# EAGLE board source_eagle (EAGLE 9.6.2)
REV: A
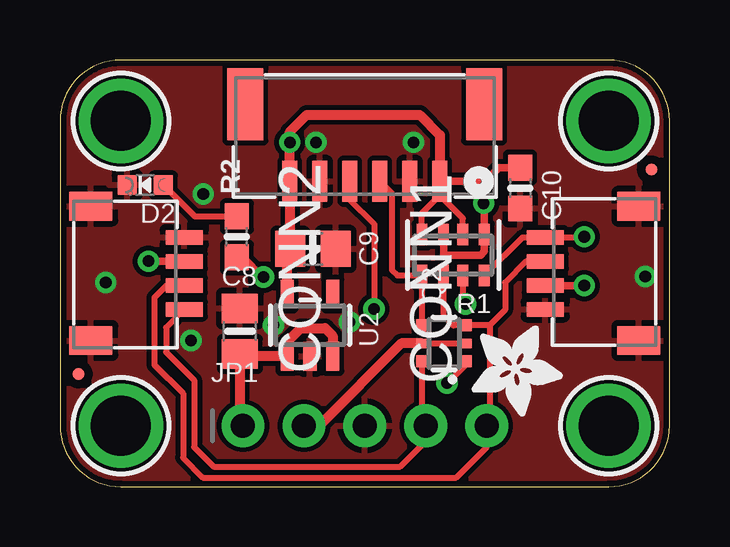
[diagram p0: board, top side]
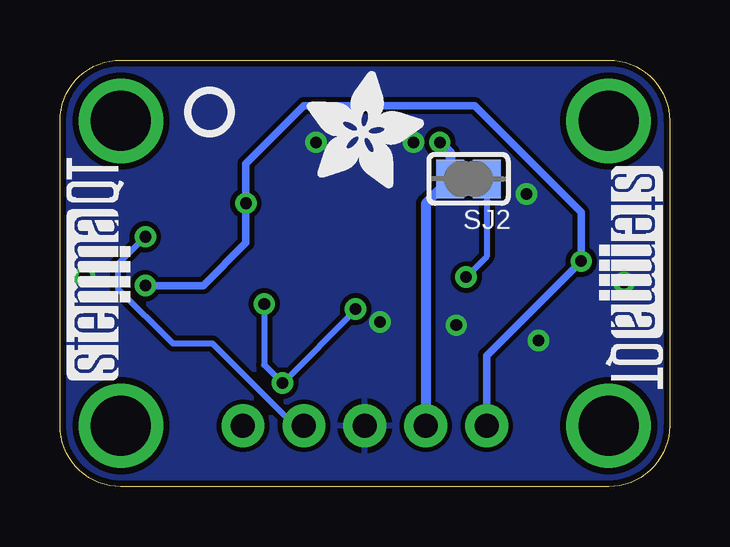
[diagram p1: board, bottom side, seen from below]

Size 25.4 x 17.78 mm. Coordinates in mm from the lower left corner, seen from the top.
Outline: 0,15.24 0,2.54 arc90 2.54,0 22.86,0 arc90 25.4,2.54 25.4,15.24 arc90 22.86,17.78 2.54,17.78 arc90 0,15.24
Copper layers (1*16): Top 0.035mm / dielectric 1.5mm / Bottom 0.035mm
Design rules "adafruit *": minimum track width 8mil, minimum drill 15.5mil, track to track 8mil, track to pad 8mil, pad to pad 8mil, via to via 8mil, smd to smd 8mil, copper to edge 10mil, drill to drill 8mil, minimum pad ring 10mil, minimum via ring 8mil, stop-mask expansion 2mil, vias tented up to drill 20mil, thermal gap 10mil
Net classes: 1 highpower: width 0.305 mm, drill 0.483 mm; 2 lowpower: width 0.254 mm, drill 0.483 mm

## Footprints (pad centres in the part's own frame; a part is rotated, then mirrored left to right if it is on the bottom)
0805-NO = smd 1.24 x 1.5: 1 -0.95,0; 2 0.95,0
0603-NO = smd 1.075 x 1: 1 -0.85,0; 2 0.85,0
JST_SH4 = smd 0.6 x 1.55: 1 -1.5,2.006; 2 -0.5,2.006; 3 0.5,2.006; 4 1.5,2.006 | smd 1.2 x 1.8: MT1 -2.8,-1.894; MT2 2.8,-1.894
CHIPLED_0603_NOOUTLINE = smd 0.8 x 0.8: A 0,-0.75; C 0,0.75
FIDUCIAL_0.5MM = smd 0.5 x 0.5: 1 0,0
1X05_ROUND_70 = drill 1 pad 1.778: 1 -5.08,0; 2 -2.54,0; 3 0,0; 4 2.54,0; 5 5.08,0
SOT363 = smd 0.5 x 0.5: 1 -0.75,-0.9; 3 0.75,-0.9; 4 0.75,0.9; 6 -0.75,0.9 | smd 0.4 x 0.5: 2 0,-0.9; 5 0,0.9
RESPACK_4X0603 = smd 0.45 x 0.9: 1 -1.3,-0.85; 2 -0.4,-0.85; 3 0.4,-0.85; 4 1.3,-0.85; 5 1.3,0.85; 6 0.4,0.85; 7 -0.4,0.85; 8 -1.3,0.85
SOLDERJUMPER_CLOSEDWIRE = smd 1.168 x 1.6: 1 -0.762,0; 2 0.762,0 | smd 0.635 x 0.203: WIRE 0,0
SOT23-5 = smd 0.55 x 1.2: 1 -0.95,-1.3; 2 0,-1.3; 3 0.95,-1.3; 4 0.95,1.3; 5 -0.95,1.3
MOUNTINGHOLE_2.5_PLATED = drill 2.5 pad 3.2: P$1 0,0
CONN_SM06B-GHS-TB_JST = smd 0.61 x 1.702: 1 -3.125,1.876; 2 -1.875,1.876; 3 -0.625,1.876; 4 0.625,1.876; 5 1.875,1.876; 6 3.125,1.876 | smd 1.5 x 3: 7 -4.975,-1.324; 8 4.975,-1.324

## Placement (x,y rotation side)
C8  10uF  [0805-NO]  7.49,6.48 90 top
C9  10uF  [0805-NO]  10.54,9.91 0 top
C10  0.1uF  [0603-NO]  19.18,12.45 270 top
CONN1  STEMMA_I2C_QT  [JST_SH4]  22.23,8.89 90 top
CONN2  STEMMA_I2C_QT  [JST_SH4]  3.17,8.89 270 top
D2  GREEN  [CHIPLED_0603_NOOUTLINE]  3.56,12.57 90 top
FID1  FIDUCIAL_0.5MM  [FIDUCIAL_0.5MM]  0.76,4.7 0 top
FID2  FIDUCIAL_0.5MM  [FIDUCIAL_0.5MM]  24.64,13.21 0 top
JP1  [1X05_ROUND_70]  12.7,2.54 0 top
PLABEL14  [PLABEL14]  6.48,13.34 90 top
PLABEL15  [PLABEL15]  20.32,14.35 90 top
PLABEL16  [PLABEL16]  7.62,0.89 0 top
PLABEL17  [PLABEL17]  10.03,4.19 0 top
PLABEL18  [PLABEL18]  12.83,0.89 0 top
PLABEL19  [PLABEL19]  15.24,4.19 0 top
PLABEL20  [PLABEL20]  18.03,0.89 0 top
PLABEL21  [PLABEL21]  0.38,12.45 0 top
PLABEL22  [PLABEL22]  12.7,0.89 0 bottom
PLABEL23  [PLABEL23]  8.26,14.61 0 bottom
PLABEL24  [PLABEL24]  12.7,7.62 0 bottom
Q2  BSS138  [SOT363]  16,5.97 90 top
R1  10K Pack  [RESPACK_4X0603]  16.38,9.65 180 top
R2  10K  [0603-NO]  7.37,10.41 90 top
SJ2  [SOLDERJUMPER_CLOSEDWIRE]  8.38,12.83 180 bottom
U2  AP2127K-3.3  [SOT23-5]  10.41,6.73 0 top
U$2  [ADAFRUIT_5MM]  15.11,12.45 0 bottom
U$35  MOUNTINGHOLE2.5  [MOUNTINGHOLE_2.5_PLATED]  2.54,15.24 0 top
U$36  MOUNTINGHOLE2.5  [MOUNTINGHOLE_2.5_PLATED]  22.86,15.24 0 top
U$38  MOUNTINGHOLE2.5  [MOUNTINGHOLE_2.5_PLATED]  2.54,2.54 0 top
U$39  MOUNTINGHOLE2.5  [MOUNTINGHOLE_2.5_PLATED]  22.86,2.54 0 top
U$41  [ADAFRUIT_3.5MM]  17.14,6.73 270 top
U$42  [PCBFEAT-REV-040]  19.18,15.62 0 bottom
U$43  [STEMMAQT]  22.48,4.45 90 bottom
U$44  [STEMMAQT]  2.92,13.34 270 bottom
X1  SM06B-GHS-TB  [CONN_SM06B-GHS-TB_JST]  12.7,14.61 180 top

## Library data of the parts
C8-C10 FID1 FID2 JP1 R1 R2 SJ2 U$2 U$41 U$42 = microbuilder
CONN1 CONN2 = adafruit_electromech; LCSC: C2845363
D2 Q2 = microbuilder; JLC_ROTATION: 270
PLABEL14-PLABEL24 = pinguin
U2 = adafruit_power; JLC_ROTATION: 270
U$35 U$36 U$38 U$39 = adafruit_electromech; BOM: EXCLUDE
U$43 U$44 = silks
X1 = adafruit_electromech

## Nets
3.3V [lowpower]: C9.1 C10.1 JP1.2 Q2.2 Q2.5 R1.2 R1.4 SJ2.2 U2.5 X1.1 X1.6
GND [highpower]: C8.2 C9.2 C10.2 CONN1.1 CONN1.MT1 CONN1.MT2 CONN2.1 CONN2.MT1 CONN2.MT2 D2.C JP1.3 U2.2 X1.2 X1.5
N$5: D2.A R2.2
N$6 [lowpower]: R2.1 SJ2.1
SCL: CONN1.4 CONN2.4 JP1.4 Q2.6 R1.8
SCL_3V: Q2.1 R1.7 X1.4
SDA: CONN1.3 CONN2.3 JP1.5 Q2.3 R1.6
SDA_3V: Q2.4 R1.5 X1.3
VCC [highpower]: C8.1 CONN1.2 CONN2.2 JP1.1 R1.1 R1.3 U2.1 U2.3

## Tracks (layer width: path | path; a pad name or v marks a point on that pad's centre or on a via)
3.3V  (via drill 0.48)
  Top 0.254: Q2.5 Q2.2 | R1.4 15.08,11.4 15.82,12.14 | 15.82,12.14 X1.1 | R1.2 16.78,11.18 15.82,12.14
  Top 0.305: C10.1 18.29,13.3 17.72,12.73 X1.1
  Top 0.406: U2.5 9.46,9.78 C9.1 9.59,12.71 X1.6 v9.57,14.35 9.57,14.78 10.29,15.49 14.99,15.49 15.82,14.65 X1.1 | Q2.5 14.22,5.97 10.79,2.54 JP1.2
  Bottom 0.406: v9.57,14.35 9.14,13.92 SJ2.2 10.16,11.81 JP1.2
GND  (via drill 0.48)
  other vias: 10.67,14.35 14.73,14.35 8.89,6.73 5.97,12.19 1.91,8.51 24.38,8.76 12.06,6.86 5.46,6.1
  pour Top: 0,17.78 25.4,17.78 25.4,0 0,0
  pour Bottom: 0,17.78 25.4,17.78 25.4,0 0,0
N$5
  Top 0.254: D2.A 5.62,11.26 R2.2
N$6  (via drill 0.48)
  Top 0.254: v8.48,8.73 7.65,9.56 R2.1
  Bottom 0.254: SJ2.1 7.62,9.59 v8.48,8.73
SCL  (via drill 0.48)
  Top 0.254: R1.8 19.27,10.39 CONN1.4 21.82,10.39 v21.84,10.41 | JP1.4 15.18,2.6 | 15.18,2.6 15.1,2.68 Q2.6 | CONN2.4 4.42,6.63 4.42,5.61 5.59,4.44 5.59,1.65 6.4,0.84 14.17,0.84 15.24,1.91 15.24,2.41 15.18,2.48 15.18,2.6
  Bottom 0.254: v21.84,10.41 22.99,9.27 22.99,8.26 20.7,5.97 19.05,5.97 15.62,2.54 JP1.4
SCL_3V  (via drill 0.48)
  Top 0.254: Q2.1 16.9,5.09 v16.13,4.32 | X1.4 12.07,11.97 13.09,10.95 13.09,7.41 v13.08,7.4 | R1.7 16.78,7.73 v16.89,7.62
  Bottom 0.254: v13.08,7.4 13.08,7.37 v16.13,4.32 16.89,5.08 v16.89,7.62
SDA
  Top 0.254: 17.91,6.72 Q2.3 16.39,6.72 15.98,7.13 R1.6 | CONN1.3 19.42,9.39 18.54,8.51 18.54,7.37 17.91,6.73 17.91,6.72 | 17.91,6.72 17.91,2.67 JP1.5 17.78,1.65 16.51,0.38 5.96,0.38 5.13,1.21 5.13,3.89 3.94,5.08 3.94,7.87 4.45,8.39 CONN2.3
SDA_3V
  Top 0.254: X1.3 13.83,12.22 13.83,9.03 14.06,8.8 R1.5 15.1,8.78 Q2.4
VCC  (via drill 0.48)
  Top 0.305: R1.3 15.98,9.67 16,9.65 17.53,9.65 17.68,9.81 R1.1 17.68,11.78 v17.65,11.81 | v21.84,8.38 CONN1.2 | CONN2.2 3.69,9.39 v3.68,9.4
  Top 0.406: U2.3 11.36,6.29 11.05,6.6 10.03,6.6 9.46,6.04 U2.1 7.59,5.43 C8.1 7.49,2.67 JP1.1
  Bottom 0.305: v21.84,8.38 19.43,8.38 17.65,10.16 v17.65,11.81 17.65,13.46 15.24,15.88 8.13,15.88 3.68,11.43 v3.68,9.4 7.62,5.46 JP1.1

## Text on the board
Pinguin_tBackup: 6x | on | 3Vo | SCL | VIN | GND | SDA
Pinguin_bBackup: LED | SEN-6x / I2C QT Power / Adapter | VLogic/Vcc: 3-5VDC